# Altium PCB Top_board.PcbDoc (part 2 of 2)
Units mm, origin at the board's own origin, x right, y up, seen from the top; angles counter-clockwise.
Board outline 102 x 58.5 mm, 2 copper layers (Top Layer, Bottom Layer); 127 components, 87 nets, 328 pads, 86 vias.
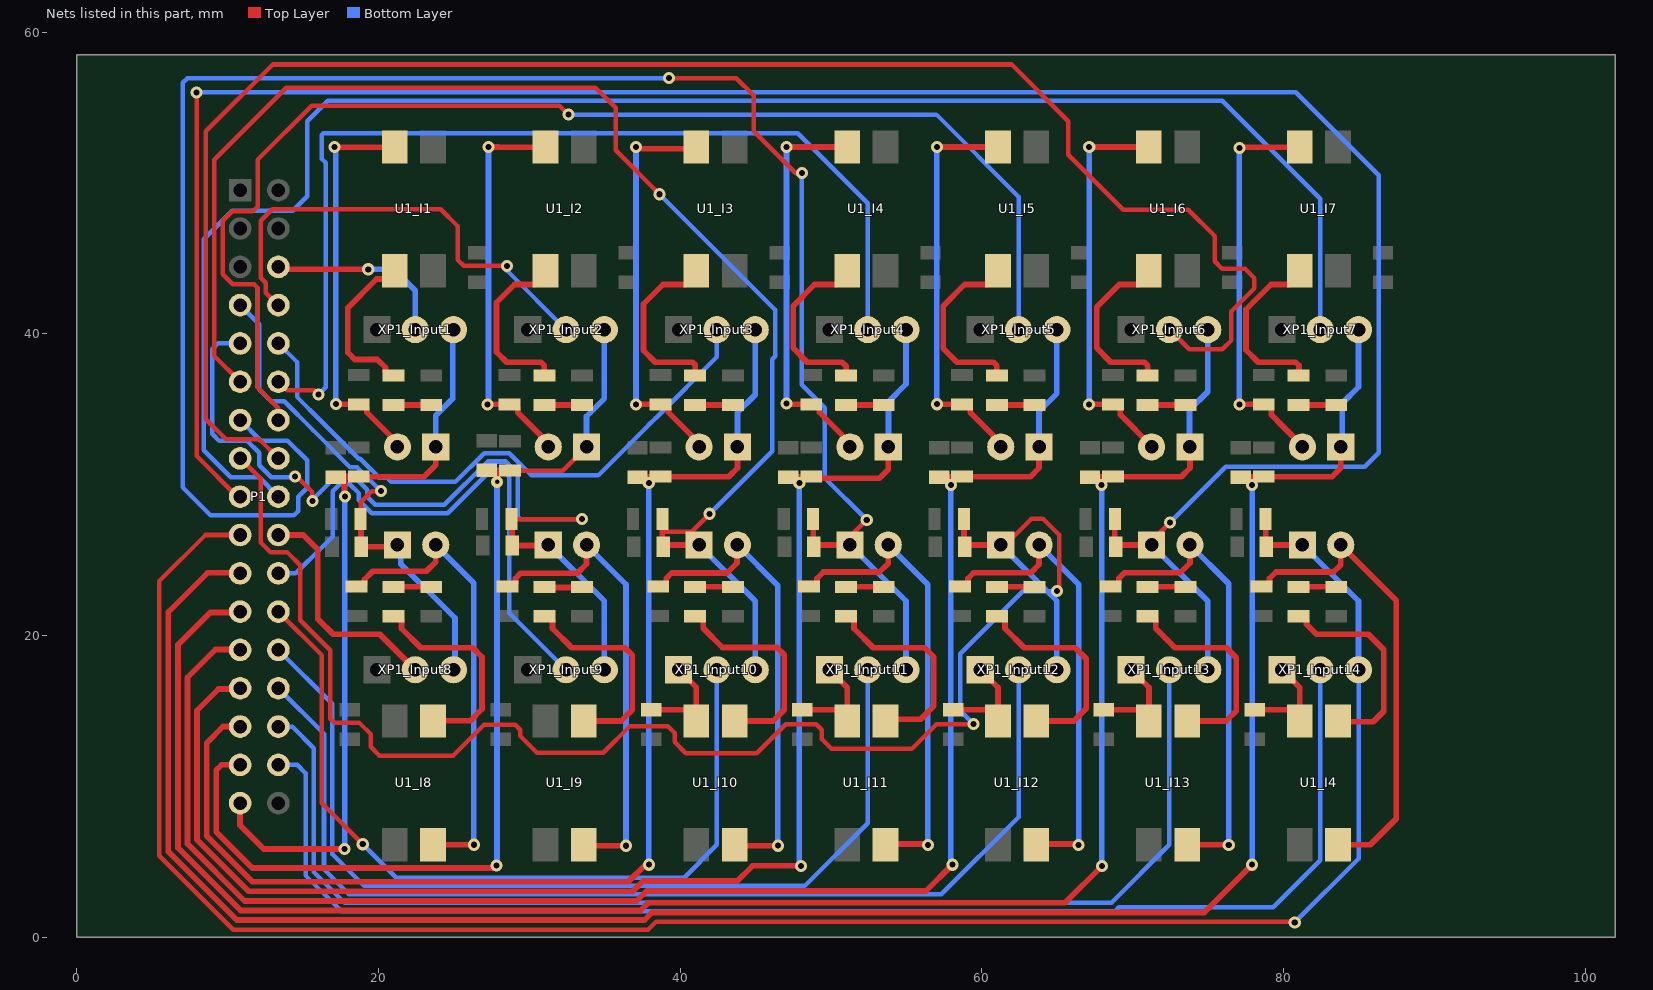
[diagram p2: the nets of this part, all layers, seen from the top]

## Via types
v1: diameter 0.8, hole 0.4, Top Layer to Bottom Layer, tented both sides, 71 vias
v2: diameter 1.27, hole 0.711, Top Layer to Bottom Layer, tented both sides, 14 vias
v3: diameter 0.8, hole 0.3, Top Layer to Bottom Layer, tented both sides, 1 vias

## Nets (pads, with @x,y where several pads share a name; then routed paths per layer and width w, separated by ;. In a path a pad name is that pad's centre, name@x,y a point inside that pad or via, vN(x,y) a via of type N, cw(c..) or ccw(c..) an arc to the next point about the centre after c; other vN are vias at no path point) (continued)
NetC1_Input10_2: C1_Input10.2 U1_I10.2 XP1_Input10.1 | length 7.1
  Top Layer w0.381: C1_Input10.2@38.1,15.08 40.42,15.08 U1_I10.2@41.08,14.42 ; XP1_Input10.1@39.9,17.725 41.08,16.545 U1_I10.2@41.08,14.42 ; U1_I10.2@41.08,14.332 U1_I10.2@41.08,14.42
NetC1_Input11_2: C1_Input11.2 U1_I11.2 XP1_Input11.1 | length 7.1
  Top Layer w0.381: C1_Input11.2@48.1,15.075 50.421,15.075 U1_I11.2@51.08,14.416 ; XP1_Input11.1@49.9,17.725 51.08,16.545 U1_I11.2@51.08,14.416 ; U1_I11.2@51.08,14.327 U1_I11.2@51.08,14.416
NetC1_Input12_2: C1_Input12.2 U1_I12.2 XP1_Input12.1 | length 7.1
  Top Layer w0.381: C1_Input12.2@58.1,15.075 60.421,15.075 U1_I12.2@61.08,14.416 ; XP1_Input12.1@59.9,17.725 61.08,16.545 U1_I12.2@61.08,14.416 ; U1_I12.2@61.08,14.327 U1_I12.2@61.08,14.416
NetC1_Input13_2: C1_Input13.2 U1_I13.2 XP1_Input13.1 | length 7.1
  Top Layer w0.381: C1_Input13.2@68.1,15.075 70.421,15.075 U1_I13.2@71.08,14.416 ; XP1_Input13.1@69.9,17.725 71.08,16.545 U1_I13.2@71.08,14.416 ; U1_I13.2@71.08,14.327 U1_I13.2@71.08,14.416
NetC1_Input14_2: C1_Input14.2 U1_I4.2@81.08,14.327 XP1_Input14.1 | length 16.2
  Top Layer w0.3: C1_Input14.2@78.1,15.075 79.197,15.075 80.099,15.075 ; U1_I4.2@81.08,14.327 81.08,14.416 U1_I4.2@81.08,14.757 ; U1_I4.2@81.08,14.757 80.416,14.757 U1_I4.2@81.08,14.757
  Top Layer w0.381: XP1_Input14.1@79.9,17.725 81.08,16.545 ; U1_I4.2@80.421,15.075 C1_Input14.2@78.1,15.075 U1_I4.2@80.421,15.075 ; U1_I4.2@80.421,15.075 U1_I4.2@81.08,14.416 ; U1_I4.2@80.421,15.075 U1_I4.2@81.08,14.416 ; U1_I4.2@81.08,14.416 81.08,16.545 ; U1_I4.2@81.08,14.416 81.08,16.545
NetHL1_Input1_1: HL1_Input1.1 R1_Input1.2 | length 2.5
  Top Layer w0.381: HL1_Input1.1@21,35.275 R1_Input1.2@23.5,35.275
NetHL1_Input1_2: HL1_Input1.2 U1_I1.1 | length 10.9
  Top Layer w0.381: HL1_Input1.2@21,37.225 20.675,37.225 20.465,37.435 20.465,37.76 19.925,38.3 18.425,38.3 17.975,38.75 17.975,41.727 19.882,43.633 20.538,43.633 21,44.095 U1_I1.1@21.08,44.175
NetHL1_Input2_1: HL1_Input2.1 R1_Input2.2 | length 2.5
  Top Layer w0.381: HL1_Input2.1@31,35.275 R1_Input2.2@33.5,35.275
NetHL1_Input2_2: HL1_Input2.2 U1_I2.1 | length 11.8
  Top Layer w0.381: HL1_Input2.2@31,37.225 31,37.9 30.78,38.12 30.366,38.12 28.506,38.12 27.825,38.8 27.825,42.075 29.016,43.265 30.421,43.265 31,43.845 31,44.095 U1_I2.1@31.08,44.175
NetHL1_Input3_1: HL1_Input3.1 R1_Input3.2 | length 2.5
  Top Layer w0.381: HL1_Input3.1@41,35.275 R1_Input3.2@43.5,35.275
NetHL1_Input3_2: HL1_Input3.2 U1_I3.1 | length 12
  Top Layer w0.381: HL1_Input3.2@41,37.225 HL1_Input3.2@41.15,37.375 ; 41,37.65 41,37.95 40.831,38.12 39.609,38.12 38.355,38.12 37.575,38.9 37.575,41.975 38.866,43.265 40.42,43.265 41,43.845 41,44.095 U1_I3.1@41.08,44.175
NetHL1_Input4_1: HL1_Input4.1 R1_Input4.2 | length 2.5
  Top Layer w0.381: HL1_Input4.1@51,35.275 R1_Input4.2@53.5,35.275
NetHL1_Input4_2: HL1_Input4.2 U1_I4.1@51.08,44.175 | length 13.7
  Top Layer w0.381: U1_I4.1@51.08,44.175 51,44.095 51,43.845 50.421,43.265 48.916,43.265 47.5,41.85 47.5,39.05 48.43,38.12 49.609,38.12 50.735,38.12 51.012,37.842 HL1_Input4.2@51.012,37.563 ; HL1_Input4.2@50.675,37.225 HL1_Input4.2@51.012,37.563 ; HL1_Input4.2@50.675,37.225 HL1_Input4.2@51.012,37.563 ; HL1_Input4.2@50.675,37.225 HL1_Input4.2@51,37.225 ; HL1_Input4.2@51,37.225 50.791,37.435 HL1_Input4.2@51,37.225
NetHL1_Input5_1: HL1_Input5.1 R1_Input5.2 | length 2.5
  Top Layer w0.381: HL1_Input5.1@61,35.275 R1_Input5.2@63.5,35.275
NetHL1_Input5_2: HL1_Input5.2 U1_I5.1 | length 12.6
  Top Layer w0.381: HL1_Input5.2@60.79,37.435 HL1_Input5.2@61,37.225 61,37.897 60.777,38.12 59.61,38.12 59.609,38.12 58.355,38.12 57.45,39.025 57.45,41.85 58.866,43.265 60.421,43.265 61,43.845 61,44.095 U1_I5.1@61.08,44.175
NetHL1_Input6_1: HL1_Input6.1 R1_Input6.2 | length 2.5
  Top Layer w0.381: HL1_Input6.1@71,35.275 R1_Input6.2@73.5,35.275
NetHL1_Input6_2: HL1_Input6.2 U1_I6.1 | length 12.1
  Top Layer w0.381: HL1_Input6.2@70.791,37.435 HL1_Input6.2@71,37.225 71,37.896 70.777,38.12 69.609,38.12 68.556,38.12 67.625,39.05 67.625,41.775 69.116,43.265 70.421,43.265 71,43.845 71,44.095 U1_I6.1@71.08,44.175
NetHL1_Input7_1: HL1_Input7.1 R1_Input7.2 | length 2.5
  Top Layer w0.381: HL1_Input7.1@81,35.275 R1_Input7.2@83.5,35.275
NetHL1_Input7_2: HL1_Input7.2 U1_I7.1 | length 12.5
  Top Layer w0.381: HL1_Input7.2@80.79,37.435 HL1_Input7.2@81,37.225 81.025,37.25 81.025,37.896 80.802,38.12 79.609,38.12 78.331,38.12 77.525,38.925 77.525,41.62 79.171,43.265 80.421,43.265 81.08,43.925 U1_I7.1@81.08,44.175 U1_I7.1@81,44.095
NetHL1_Input8_1: HL1_Input8.1 R1_Input8.2 | length 2.5
  Top Layer w0.381: HL1_Input8.1@21,23.225 R1_Input8.2@23.5,23.225
NetHL1_Input8_2: HL1_Input8.2 U1_I8.1 | length 14.4
  Top Layer w0.381: HL1_Input8.2@21,21.275 21.325,21.275 21.534,21.065 21.534,20.467 22.812,19.19 26.25,19.19 26.875,18.565 26.875,15.125 26.097,14.347 23.6,14.347 U1_I8.1@23.62,14.327
NetHL1_Input9_1: HL1_Input9.1 R1_Input9.2 | length 5
  Top Layer w0.381: HL1_Input9.1@31,23.225 HL1_Input9.1@31,23.175 ; R1_Input9.2@33.5,23.225 R1_Input9.2@33.45,23.175 ; HL1_Input9.1@31,23.175 R1_Input9.2@33.45,23.175 ; HL1_Input9.1@31,23.175 R1_Input9.2@33.45,23.175
NetHL1_Input9_2: HL1_Input9.2 U1_I9.1 | length 14.4
  Top Layer w0.381: HL1_Input9.2@31,21.275 31.325,21.275 31.535,21.065 31.535,20.467 32.812,19.19 36.335,19.19 36.825,18.7 36.825,15.075 36.077,14.327 U1_I9.1@33.62,14.327
NetHL1_Input10_1: HL1_Input10.1 R1_Input10.2 | length 5
  Top Layer w0.381: HL1_Input10.1@41,23.23 43.5,23.23 HL1_Input10.1@41,23.23
NetHL1_Input10_2: HL1_Input10.2 U1_I10.1 | length 14.5
  Top Layer w0.381: HL1_Input10.2@41,21.275 41.325,21.275 41.534,21.065 41.534,20.842 41.534,20.472 42.812,19.195 46.43,19.195 46.9,18.725 46.9,15.075 46.152,14.327 U1_I10.1@43.62,14.327
NetHL1_Input11_1: HL1_Input11.1 R1_Input11.2 | length 2.5
  Top Layer w0.381: HL1_Input11.1@51,23.225 R1_Input11.2@53.5,23.225
NetHL1_Input11_2: HL1_Input11.2 U1_I11.1 | length 14.2
  Top Layer w0.381: HL1_Input11.2@51,21.275 51.325,21.275 51.535,21.065 51.535,20.842 51.535,20.467 52.812,19.19 56.21,19.19 56.825,18.575 56.825,15.325 55.95,14.45 53.743,14.45 U1_I11.1@53.62,14.327
NetHL1_Input12_1: HL1_Input12.1 R1_Input12.2 | length 2.5
  Top Layer w0.381: HL1_Input12.1@61,23.225 R1_Input12.2@63.5,23.225
NetHL1_Input12_2: HL1_Input12.2 U1_I12.1 | length 14.4
  Top Layer w0.381: HL1_Input12.2@61,21.275 61.325,21.275 61.534,21.065 61.534,20.842 61.534,20.467 62.812,19.19 66.185,19.19 66.925,18.45 66.925,15.15 66.102,14.327 U1_I12.1@63.62,14.327
NetHL1_Input13_1: HL1_Input13.1 R1_Input13.2 | length 2.5
  Top Layer w0.381: HL1_Input13.1@71,23.225 R1_Input13.2@73.5,23.225
NetHL1_Input13_2: HL1_Input13.2 U1_I13.1 | length 14.4
  Top Layer w0.381: HL1_Input13.2@71,21.275 71.325,21.275 71.534,21.065 71.534,20.467 72.812,19.19 76.21,19.19 76.875,18.525 76.875,15 76.202,14.327 U1_I13.1@73.62,14.327
NetHL1_Input14_1: HL1_Input14.1 R1_Input14.2 | length 2.5
  Top Layer w0.381: HL1_Input14.1@81,23.225 R1_Input14.2@83.5,23.225
NetHL1_Input14_2: HL1_Input14.2 U1_I4.1@83.62,14.327 | length 14.2
  Top Layer w0.381: HL1_Input14.2@81,21.275 81.325,21.275 81.535,21.065 81.535,20.74 82.2,20.075 85.625,20.075 86.65,19.05 86.65,14.975 85.95,14.275 83.672,14.275 U1_I4.1@83.62,14.327
NetR2_Input1_2: P0.2 R2_Input1.2 U1_I1.4 | length 26.8
  Top Layer w0.381: v1@17.105,52.355 v1@17.125,52.375 ; v1(17.175,35.35) 17.2,35.325 R2_Input1.2@18.7,35.325 19.025,35.325 19.235,35.115 19.235,34.79 21.26,32.765 P0.2@21.26,32.5 ; U1_I1.4@21.08,52.375 v1@17.125,52.375 ; v1@17.125,52.375 17.075,52.325 v1@17.125,52.375
  Bottom Layer w0.381: v1(17.075,52.385) 17.075,52.272 17.175,52.172 v1(17.175,35.35)
NetR2_Input2_2: P1.2@31.26,32.5 R2_Input2.2 U1_I2.4 | length 27.1
  Top Layer w0.3: v1@27.405,52.28 27.53,52.28 v1@27.53,52.38
  Top Layer w0.381: v1(27.225,35.325) R2_Input2.2@28.7,35.325 29.025,35.325 29.234,35.115 29.234,34.79 31.26,32.765 P1.2@31.26,32.5 ; v1@27.53,52.38 27.938,52.38 27.968,52.375 U1_I2.4@31.08,52.375 ; v1@27.405,52.28 27.3,52.175 v1@27.405,52.28 ; v1@27.405,52.28 27.53,52.405 v1@27.405,52.28
  Bottom Layer w0.381: v1(27.225,35.325) 27.3,35.4 v1(27.3,52.385)
NetR2_Input3_2: P2.2 R2_Input3.2 U1_I3.4 | length 30.7
  Top Layer w0.381: v1(37.075,35.325) R2_Input3.2@38.7,35.325 39.025,35.325 39.235,35.115 39.235,34.79 41.26,32.765 P2.2@41.26,32.5 ; U1_I3.4@41.08,52.375 U1_I3.4@40.975,52.27 ; U1_I3.4@40.975,52.27 37.075,52.27 U1_I3.4@40.975,52.27
  Bottom Layer w0.381: v1(37.075,35.325) v1(37.075,52.385)
NetR2_Input4_2: P3.2 R2_Input4.2 U1_I4.4@51.08,52.375 | length 26.8
  Top Layer w0.381: v1(47.06,35.365) 47.1,35.325 R2_Input4.2@48.7,35.325 49.025,35.325 49.234,35.115 49.234,34.79 51.26,32.765 P3.2@51.26,32.5 ; v1(47.06,52.385) 51.07,52.385 U1_I4.4@51.08,52.375
  Bottom Layer w0.381: v1(47.06,35.365) v1(47.06,52.385)
NetR2_Input5_2: P4.2 R2_Input5.2 U1_I5.4 | length 26.9
  Top Layer w0.381: v1(57.02,52.385) 61.07,52.385 U1_I5.4@61.08,52.375 ; v1(57.045,35.33) 57.05,35.325 R2_Input5.2@58.7,35.325 59.025,35.325 59.234,35.115 59.234,34.79 61.26,32.765 P4.2@61.26,32.5
  Bottom Layer w0.381: v1(57.02,52.385) 57.02,35.355 v1(57.045,35.33)
NetR2_Input6_2: P5.2 R2_Input6.2 U1_I6.4 | length 26.7
  Top Layer w0.381: v1(67.115,35.315) 67.125,35.325 R2_Input6.2@68.7,35.325 68.977,35.325 69.186,35.115 69.186,34.64 71.26,32.567 P5.2@71.26,32.5 ; v1(67.125,52.385) 71.07,52.385 U1_I6.4@71.08,52.375
  Bottom Layer w0.381: v1(67.115,35.315) 67.125,35.325 v1(67.125,52.385)
NetR2_Input7_2: P6.2 R2_Input7.2 U1_I7.4 | length 26.7
  Top Layer w0.381: v1(77.075,35.325) R2_Input7.2@78.7,35.325 78.977,35.325 79.186,35.115 79.186,34.64 79.991,33.835 79.991,33.834 81.26,32.565 P6.2@81.26,32.5 ; v1(77.075,52.325) 77.125,52.375 77.525,52.375 U1_I7.4@81.08,52.375
  Bottom Layer w0.381: v1(77.075,35.325) v1(77.075,52.325)
NetR2_Input8_2: P7.2 R2_Input8.2 U1_I8.4 | length 31.4
  Top Layer w0.381: R2_Input8.2@18.55,23.25 R2_Input8.2@18.55,23.175 ; U1_I8.4@23.62,6.127 U1_I8.4@23.647,6.1 ; P7.2@23.8,26 23.8,24.875 23.175,24.25 19.625,24.25 19.084,23.71 19.084,23.385 R2_Input8.2@18.875,23.175 ; v1(26.325,6.125) U1_I8.4@23.672,6.125 ; R2_Input8.2@18.55,23.175 R2_Input8.2@18.875,23.175 ; R2_Input8.2@18.55,23.175 R2_Input8.2@18.875,23.175 ; U1_I8.4@23.647,6.1 U1_I8.4@23.672,6.125 ; U1_I8.4@23.647,6.1 U1_I8.4@23.672,6.125
  Bottom Layer w0.381: P7.2@23.8,26 26.325,23.475 v1(26.325,6.125)
NetR2_Input9_2: P8.2 R2_Input9.2 U1_I9.4 | length 31.2
  Top Layer w0.381: R2_Input9.2@28.55,23.25 28.875,23.25 29.084,23.459 29.084,23.785 29.42,24.12 33.18,24.12 33.8,24.74 P8.2@33.8,26 ; U1_I9.4@33.62,6.125 33.687,6.058 v1(36.42,6.058)
  Bottom Layer w0.381: P8.2@33.8,26 36.42,23.38 v1@36.42,6.06
NetR2_Input10_2: P9.2 R2_Input10.2 U1_I10.4 | length 31.3
  Top Layer w0.381: R2_Input10.2@38.55,23.25 38.875,23.25 39.085,23.459 39.085,23.785 39.44,24.14 43.112,24.14 43.772,24.8 43.772,25.972 P9.2@43.8,26 ; v1(46.48,6.06) U1_I10.4@43.692,6.06 ; U1_I10.4@43.692,6.06 43.62,6.132 U1_I10.4@43.692,6.06
  Bottom Layer w0.381: P9.2@43.8,26 46.48,23.32 v1(46.48,6.06)
NetR2_Input11_2: 10.2 R2_Input11.2 U1_I11.4 | length 33.9
  Top Layer w0.381: R2_Input11.2@48.55,23.25 48.875,23.25 49.084,23.459 49.084,23.785 49.5,24.2 53.225,24.2 53.8,24.775 10.2@53.8,26 ; U1_I11.4@53.62,6.127 U1_I11.4@53.668,6.175 ; U1_I11.4@53.668,6.175 56.425,6.175 U1_I11.4@53.668,6.175
  Bottom Layer w0.381: 10.2@53.8,26 56.425,23.375 v1(56.425,6.1)
NetR2_Input12_2: 11.2 R2_Input12.2 U1_I12.4 | length 33.9
  Top Layer w0.381: R2_Input12.2@58.55,23.25 58.875,23.25 59.085,23.459 59.085,23.785 59.45,24.15 63.25,24.15 63.8,24.7 11.2@63.8,26 ; U1_I12.4@63.62,6.127 U1_I12.4@63.668,6.175 ; U1_I12.4@63.668,6.175 66.425,6.175 U1_I12.4@63.668,6.175
  Bottom Layer w0.381: 11.2@63.8,26 66.425,23.375 v1(66.425,6.1)
NetR2_Input13_2: P12.2 R2_Input13.2 U1_I13.4 | length 33.8
  Top Layer w0.381: R2_Input13.2@68.55,23.25 68.875,23.25 69.084,23.459 69.084,23.785 69.45,24.15 73.15,24.15 73.8,24.8 P12.2@73.8,26 ; U1_I13.4@73.62,6.127 U1_I13.4@73.622,6.125 ; U1_I13.4@73.622,6.125 76.375,6.125 U1_I13.4@73.622,6.125
  Bottom Layer w0.381: P12.2@73.8,26 76.375,23.425 v1(76.375,6.1)
NetR2_Input14_2: P13.2 R2_Input14.2 U1_I4.4@83.62,6.127 | length 31.6
  Top Layer w0.381: R2_Input14.2@78.55,23.25 78.875,23.25 79.085,23.459 79.085,23.785 79.5,24.2 83.325,24.2 83.8,24.675 P13.2@83.8,26 87.475,22.325 87.475,7.85 85.752,6.127 U1_I4.4@83.62,6.127
P1: C2_Input1.2 P0.1 P1.33 R3_Input1.2 XP1_Input1.3 | length 51.9
  Top Layer w0.3: R3_Input1.2@18.7,30.525 R3_Input1.2@19,30.525
  Top Layer w0.381: P1.33@10.83,8.88 10.83,7.42 12.4,5.85 v1(17.75,5.85) ; v1(17.776,29.226) 17.776,29.34 v1@17.75,29.366 ; R3_Input1.2@18.7,30.525 18.687,30.513 17.188,30.513 C2_Input1.2@17.175,30.5 C2_Input1.2@17.75,30.5 ; R3_Input1.2@19,30.525 23.025,30.525 23.8,31.3 23.8,32.45 23.775,32.475 P0.1@23.8,32.5 ; v1@17.75,29.366 C2_Input1.2@17.75,30.5 ; v1@17.75,29.366 C2_Input1.2@17.75,30.5
  Bottom Layer w0.381: v1(17.75,5.85) 17.776,5.876 v1(17.776,29.226) ; P0.1@23.8,32.5 23.8,34.575 24.92,35.695 24.92,40.215 XP1_Input1.3@24.98,40.275
P2: C2_Input2.2 P1.1@33.8,32.5 P1.31 R3_Input2.2 XP1_Input2.3 | length 67.2
  Top Layer w0.3: C2_Input2.2@27.175,30.95 27.915,30.95 ; v3(27.867,30.175) 27.915,30.223 27.915,30.95 ; P1.1@33.8,32.5 32.225,30.925 R3_Input2.2@28.725,30.925 27.94,30.925 27.915,30.95
  Top Layer w0.381: P1.31@10.83,11.42 9.595,11.42 9.25,11.075 9.25,6.975 11.642,4.582 24.654,4.582 27.657,4.582 v1(27.825,4.75)
  Bottom Layer w0.381: v1(27.825,4.75) 27.867,4.792 27.867,26.336 27.867,26.403 v3(27.867,30.175) ; P1.1@33.8,32.5 33.8,34.525 34.98,35.705 XP1_Input2.3@34.98,40.275
P3: C2_Input3.2 P1.29 P2.1 R3_Input3.2 XP1_Input3.3 | length 82.9
  Top Layer w0.3: C2_Input3.2@37.175,30.5 37.603,30.5 38.055,30.048 R3_Input3.2@38.055,30.525 ; 37.937,30.513 37.937,30.525 R3_Input3.2@38.055,30.525 ; R3_Input3.2@38.7,30.525 R3_Input3.2@38.055,30.525
  Top Layer w0.381: P1.29@10.83,13.96 9.7,13.96 8.615,12.875 8.615,6.712 11.656,3.671 36.571,3.671 37.7,4.8 v1(37.95,4.8) ; v1(37.925,30.1) 37.937,30.113 37.937,30.513 ; R3_Input3.2@38.7,30.525 43.225,30.525 43.8,31.1 P2.1@43.8,32.5
  Bottom Layer w0.381: v1(37.925,30.1) 37.925,4.825 v1(37.95,4.8) ; P2.1@43.8,32.5 43.8,34.784 44.98,35.964 XP1_Input3.3@44.98,40.275
P4: C2_Input4.2 P1.27 P3.1 R3_Input4.2 XP1_Input4.3 | length 97.1
  Top Layer w0.3: C2_Input4.2@47.175,30.5 47.9,30.5 47.9,30.513 ; v1(47.902,30.1) 47.902,30.525 R3_Input4.2@48.7,30.525
  Top Layer w0.381: P1.27@10.83,16.5 10.747,16.5 10.697,16.45 9.4,16.45 7.98,15.03 7.98,6.449 11.393,3.036 36.855,3.036 37.54,3.72 43.792,3.72 44.797,4.725 v1(48.025,4.725) ; 47.9,30.513 47.9,30.1 47.9,29.979 v1@47.902,29.976 ; R3_Input4.2@48.7,30.525 48.7,30.425 53.225,30.425 53.8,31 P3.1@53.8,32.4
  Bottom Layer w0.381: v1@47.902,29.976 47.902,4.848 v1(48.025,4.725) ; P3.1@53.8,32.5 53.816,32.516 53.816,35.5 54.98,36.664 XP1_Input4.3@54.98,40.275
P5: C2_Input5.2 P1.25 P4.1 R3_Input5.2 XP1_Input5.3 | length 110.9
  Top Layer w0.381: P1.25@10.83,19.04 10.795,19.075 9.2,19.075 7.345,17.22 7.345,6.186 11.13,2.401 37.118,2.401 37.768,3.05 56.3,3.05 v1(58.05,4.8) ; C2_Input5.2@57.175,30.5 57.187,30.513 58.688,30.513 R3_Input5.2@58.7,30.525 ; 57.938,30.513 57.938,29.992 v1(57.953,29.976) ; R3_Input5.2@58.7,30.525 63.225,30.525 63.8,31.1 P4.1@63.8,32.5
  Bottom Layer w0.381: v1(57.953,29.976) 57.953,4.897 v1(58.05,4.8) ; P4.1@63.8,32.5 63.8,34.868 64.98,36.048 XP1_Input5.3@64.98,40.275
P6: C2_Input6.2 P1.23 P5.1 R3_Input6.2 XP1_Input6.3 | length 125.1
  Top Layer w0.381: P1.23@10.83,21.58 10.775,21.525 8.85,21.525 6.71,19.385 6.71,5.923 10.867,1.766 37.381,1.766 37.891,2.275 65.525,2.275 v1(67.975,4.725) ; C2_Input6.2@67.175,30.5 67.188,30.513 68.687,30.513 R3_Input6.2@68.7,30.525 73.225,30.525 73.8,31.1 P5.1@73.8,32.5 ; 67.95,30.513 67.95,29.98 v1(67.953,29.976)
  Bottom Layer w0.381: v1(67.953,29.976) 67.953,4.747 v1(67.975,4.725) ; P5.1@73.8,32.5 73.775,32.525 73.775,34.95 74.98,36.155 XP1_Input6.3@74.98,40.275
P7: C2_Input7.2 P1.21 P6.1 R3_Input7.2 XP1_Input7.3 | length 139.3
  Top Layer w0.381: P1.21@10.83,24.12 10.75,24.2 10.7,24.15 8.675,24.15 6.075,21.55 6.075,5.66 10.604,1.131 37.644,1.131 38.139,1.625 74.75,1.625 v1(77.925,4.8) ; C2_Input7.2@77.175,30.5 77.188,30.513 78.688,30.513 R3_Input7.2@78.7,30.525 83.225,30.525 83.8,31.1 P6.1@83.8,32.5 ; v1(77.929,29.976) 77.95,29.998 77.95,30.513
  Bottom Layer w0.381: v1(77.925,4.8) 77.929,4.804 v1(77.929,29.976) ; P6.1@83.8,32.5 83.9,32.6 83.9,35.4 84.98,36.48 XP1_Input7.3@84.98,40.275
P8: C2_Input8.2 P1.7 P7.1 R3_Input8.2 XP1_Input8.3 | length 36.1
  Top Layer w0.3: R3_Input8.2@18.825,27.725 18.825,28.833 19.558,29.566 v1(20.168,29.566)
  Top Layer w0.381: R3_Input8.2@18.825,27.725 R3_Input8.2@18.85,27.7 ; P7.1@21.26,26 P7.1@21.185,26.075 ; C2_Input8.2@18.85,25.875 R3_Input8.2@18.85,27.7 ; C2_Input8.2@18.85,25.875 R3_Input8.2@18.85,27.7 ; C2_Input8.2@18.85,25.875 C2_Input8.2@18.875,25.875 P7.1@20.985,25.875 ; P7.1@20.985,25.875 P7.1@21.185,26.075 ; P7.1@20.985,25.875 P7.1@21.185,26.075
  Bottom Layer w0.3: P1.7@10.83,41.9 12.09,40.64 12.09,36.322 12.878,35.535 13.747,35.535 15.662,33.621 18.144,31.138 18.595,31.138 v1(20.168,29.566)
  Bottom Layer w0.381: P7.1@21.26,26 21.473,25.786 21.473,24.752 25.075,21.15 25.075,17.82 XP1_Input8.3@24.98,17.725
P9: C2_Input9.2 P1.9 P8.1 R3_Input9.2 XP1_Input9.3 | length 67.1
  Top Layer w0.3: v1(14.475,30.525) 14.6,30.525 15.626,29.499 v1(15.626,28.901) ; R3_Input9.2@28.825,27.725 R3_Input9.2@28.825,27.711 ; R3_Input9.2@28.825,27.711 v1(33.503,27.711) R3_Input9.2@28.825,27.711
  Top Layer w0.381: P8.1@31.26,26 31.22,25.96 C2_Input9.2@28.875,25.96 28.85,25.985 R3_Input9.2@28.85,27.7 ; R3_Input9.2@28.85,27.7 R3_Input9.2@28.825,27.725 R3_Input9.2@28.85,27.7
  Bottom Layer w0.3: P1.9@10.83,39.36 9.366,39.36 8.976,38.97 8.976,33.374 9.456,32.894 11.308,32.894 12.1,32.102 12.1,31.284 12.898,30.486 ; v1@14.691,30.586 v1@14.652,30.625 ; v1(15.626,28.901) 15.626,28.849 15.552,28.923 16.098,29.469 17.213,30.584 18.338,30.584 19.264,29.659 19.264,29.191 19.793,28.662 24.372,28.662 27.243,31.533 28.442,31.533 29.231,30.745 29.231,27.887 29.406,27.711 v1(33.503,27.711) ; 12.898,30.486 14.691,30.486 12.898,30.486 ; v1@14.652,30.625 14.475,30.625 v1@14.652,30.625
  Bottom Layer w0.381: P8.1@31.26,26 34.98,22.28 XP1_Input9.3@34.98,17.725
P10: C2_Input10.2 P1.11 P9.1 R3_Input10.2 XP1_Input10.3 | length 100
  Top Layer w0.3: P1.11@10.83,36.82 9.119,38.531 9.119,51.537 13.894,56.312 34.392,56.312 35.725,54.978 35.725,52.159 v1(38.633,49.251) ; R3_Input10.2@38.825,27.725 38.825,26.885 ; v1(41.961,28.067) P9.1@40.779,26.885 ; 38.825,26.885 P9.1@40.779,26.885 ; 38.825,26.885 P9.1@40.779,26.885
  Top Layer w0.381: P9.1@41.26,26 39,26 C2_Input10.2@38.875,25.875 C2_Input10.2@38.825,25.925 ; C2_Input10.2@38.825,25.925 R3_Input10.2@38.825,27.725 C2_Input10.2@38.825,25.925
  Bottom Layer w0.3: v1(38.633,49.251) 46.304,41.58 46.304,38.506 46.101,38.303 46.101,32.207 v1(41.961,28.067)
  Bottom Layer w0.381: P9.1@41.26,26 44.98,22.28 XP1_Input10.3@44.98,17.725
P11: 10.1 C2_Input11.2 P1.13 R3_Input11.2 XP1_Input11.3 | length 138.8
  Top Layer w0.3: v1(39.268,56.947) 43.728,56.947 44.874,55.801 44.874,53.434 47.658,50.65 v1(48.073,50.65) ; 48.825,26.588 R3_Input11.2@48.825,27.725 ; 10.1@50.597,25.883 v1(52.375,27.661) 10.1@50.597,25.883
  Top Layer w0.381: C2_Input11.2@48.825,25.925 R3_Input11.2@48.825,27.725 C2_Input11.2@48.825,25.925 ; C2_Input11.2@48.825,25.925 C2_Input11.2@48.875,25.875 C2_Input11.2@49,26 ; C2_Input11.2@49,26 10.1@51.26,26 C2_Input11.2@49,26
  Bottom Layer w0.3: P1.13@10.83,34.28 12.192,32.918 13.97,32.918 15.279,31.609 15.279,31.141 15.279,30.192 15.271,30.184 15.271,29.796 14.675,29.2 14.675,28.25 14.382,27.957 8.89,27.957 7.036,29.811 7.036,56.642 7.341,56.947 v1(39.268,56.947) ; v1(48.073,50.65) 48.073,36.627 49.604,35.096 49.604,30.431 v1(52.375,27.661)
  Bottom Layer w0.381: 10.1@51.26,26 54.98,22.28 XP1_Input11.3@54.98,17.725
P12: 11.1 C2_Input12.2 P1.15 R3_Input12.2 XP1_Input12.3 | length 107.8
  Top Layer w0.3: P1.15@10.83,31.74 12.192,30.378 12.192,26.162 12.852,25.502 13.97,25.502 14.808,24.663 14.808,21.018 16.815,19.011 16.815,14.478 17.094,14.199 18.745,14.199 19.482,13.462 19.482,12.624 20.066,12.04 24.968,12.04 27,14.072 29.078,14.072 29.4,13.75 29.4,13.335 30.518,12.217 34.9,12.217 36.678,13.995 39.192,13.995 39.631,13.556 39.631,12.947 40.386,12.192 45.085,12.192 47.015,14.122 49.022,14.122 49.403,13.741 49.403,13.132 50.038,12.497 55.372,12.497 56.998,14.122 v1(59.461,14.122) ; 58.825,26.67 R3_Input12.2@58.825,27.725 ; 11.1@61.443,25.883 63.297,27.737 64.059,27.737 65.126,26.67 65.126,23.063 v1(64.999,22.936)
  Top Layer w0.381: R3_Input12.2@58.825,27.725 58.825,25.925 C2_Input12.2@58.875,25.875 59,26 11.1@61.26,26
  Bottom Layer w0.3: v1(59.461,14.122) 58.572,15.011 58.572,18.796 62.713,22.936 v1(64.999,22.936)
  Bottom Layer w0.381: 11.1@61.26,26 64.98,22.28 XP1_Input12.3@64.98,17.725
P13: C2_Input13.2 P1.17 P12.1 R3_Input13.2 XP1_Input13.3 | length 166.4
  Top Layer w0.3: v1(7.95,56.007) 7.95,31.897 P1.17@10.647,29.2 ; 68.825,26.908 R3_Input13.2@68.825,27.725 ; P12.1@70.866,25.883 v1(72.466,27.483) P12.1@70.866,25.883
  Top Layer w0.381: P1.17@10.647,29.2 P1.17@10.83,29.2 ; C2_Input13.2@68.825,25.925 R3_Input13.2@68.825,27.725 C2_Input13.2@68.825,25.925 ; C2_Input13.2@68.825,25.925 C2_Input13.2@68.875,25.875 C2_Input13.2@69,26 ; C2_Input13.2@69,26 P12.1@71.26,26 C2_Input13.2@69,26
  Bottom Layer w0.3: v1(7.95,56.007) 80.816,56.007 86.309,50.514 86.309,32.106 85.395,31.191 76.175,31.191 v1(72.466,27.483)
  Bottom Layer w0.381: P12.1@71.26,26 74.98,22.28 XP1_Input13.3@74.98,17.725
P14: C2_Input14.2 P1.19 P13.1 R3_Input14.2 XP1_Input14.3 | length 135.6
  Top Layer w0.3: P1.19@10.527,26.66 8.535,26.66 5.481,23.606 5.481,5.395 10.375,0.5 37.875,0.5 38.405,1.03 80.695,1.03 v1(80.75,0.975) ; C2_Input14.2@78.875,25.875 C2_Input14.2@78.875,26.449
  Top Layer w0.381: P1.19@10.527,26.66 P1.19@10.83,26.66 ; R3_Input14.2@78.825,27.725 78.825,25.925 C2_Input14.2@78.875,25.875 79,26 P13.1@81.26,26
  Bottom Layer w0.3: v1(80.75,0.975) 84.98,5.205 XP1_Input14.3@84.98,17.725
  Bottom Layer w0.381: P13.1@81.26,26 84.98,22.28 XP1_Input14.3@84.98,17.725
T1: P1.6 XP1_Input1.2 | length 12.3
  Top Layer w0.381: P1.6@13.37,44.44 13.533,44.277 v1(19.326,44.277)
  Bottom Layer w0.381: v1(19.326,44.277) 21.026,44.277 22.44,42.863 XP1_Input1.2@22.44,40.275
T2: P1.8 XP1_Input2.2 | length 31.4
  Top Layer w0.3: P1.8@13.37,41.9 12.538,42.732 12.538,43.378 12.192,43.724 12.192,47.498 12.954,48.26 24.13,48.26 25.248,47.142 25.248,44.907 25.654,44.501 v1(28.524,44.501)
  Bottom Layer w0.3: v1(28.524,44.501) 28.524,44.191 XP1_Input2.2@32.44,40.275
T3: P1.10 XP1_Input3.2 | length 40.7
  Bottom Layer w0.3: P1.10@13.37,39.36 14.605,38.125 14.605,35.814 16.216,34.203 17.135,33.284 18.694,31.725 18.792,31.725 20.047,30.47 20.542,30.47 20.837,30.175 25.102,30.175 27.014,32.087 28.672,32.087 30.145,30.614 34.589,30.614 37.896,33.921 37.896,33.933 38.367,34.404 38.379,34.404 42.44,38.465 XP1_Input3.2@42.44,40.275
T4: P1.12 XP1_Input4.2 | length 67.1
  Top Layer w0.3: P1.12@13.37,36.82 13.944,36.246 15.748,36.246 v1(16.027,35.966)
  Bottom Layer w0.3: v1(16.027,35.966) 16.51,36.449 16.51,51.333 16.256,51.587 16.256,53.188 16.358,53.289 47.803,53.289 52.44,48.652 XP1_Input4.2@52.44,40.275
T5: P1.14 XP1_Input5.2 | length 84.6
  Top Layer w0.3: P1.14@13.37,34.28 13.37,35.068 11.984,36.454 11.984,43.053 11.755,43.282 10.336,43.282 9.676,43.942 9.676,47.498 10.312,48.134 11.684,48.134 11.989,48.439 11.989,51.537 15.57,55.118 32.004,55.118 v1(32.588,54.534)
  Bottom Layer w0.3: v1(32.588,54.534) 56.998,54.534 62.44,49.091 XP1_Input5.2@62.44,40.275
T6: P1.16 XP1_Input6.2 | length 114.1
  Top Layer w0.3: P1.16@13.37,31.74 12.115,32.995 9.906,32.995 8.56,34.341 8.56,53.416 12.997,57.853 61.994,57.853 65.746,54.102 65.746,51.867 69.378,48.235 73.685,48.235 75.438,46.482 75.438,44.806 75.946,44.298 77.47,44.298 78.072,43.696 78.072,43.007 76.556,41.491 76.556,39.573 75.946,38.964 73.751,38.964 XP1_Input6.2@72.44,40.275
T7: P1.18 XP1_Input7.2 | length 112.3
  Bottom Layer w0.3: P1.18@13.37,29.2 12.09,30.48 10.212,30.48 8.422,32.27 8.422,36.454 8.422,46.268 10.312,48.158 14.326,48.158 15.291,49.124 15.291,54.102 16.637,55.448 75.952,55.448 82.44,48.96 XP1_Input7.2@82.44,40.275
T8: P1.20 XP1_Input8.2 | length 15.5
  Top Layer w0.381: P1.20@13.37,26.66 15.015,26.66 15.975,25.7 15.975,21.1 17,20.075 20.09,20.075 XP1_Input8.2@22.44,17.725
T9: P1.22 XP1_Input9.2 | length 36.3
  Bottom Layer w0.3: P1.22@13.37,24.12 14.525,24.12 15.357,24.952 15.361,24.952 16.972,26.563 16.972,29.559 17.443,30.03 18.109,30.03 18.71,29.43 18.71,28.962 19.564,28.108 24.601,28.108 27.473,30.979 28.213,30.979 28.677,30.515 28.677,21.488 XP1_Input9.2@32.44,17.725
T10: P1.24 XP1_Input10.2 | length 54.6
  Top Layer w0.3: P1.24@13.37,21.58 16.256,18.694 16.256,8.865 v1(18.961,6.159)
  Bottom Layer w0.3: v1(18.961,6.159) 21.175,3.946 40.268,3.946 42.44,6.118 XP1_Input10.2@42.44,17.725
T11: P1.26 XP1_Input11.2 | length 63.3
  Bottom Layer w0.3: P1.26@13.37,19.04 16.946,15.464 16.946,5.508 19.062,3.392 48.274,3.392 52.44,7.558 XP1_Input11.2@52.44,17.725
T12: P1.28 XP1_Input12.2 | length 71.9
  Bottom Layer w0.3: P1.28@13.37,16.5 16.392,13.478 16.392,4.492 18.046,2.838 57.321,2.838 62.44,7.957 XP1_Input12.2@62.44,17.725
T13: P1.30 XP1_Input13.2 | length 81.9
  Bottom Layer w0.3: P1.30@13.37,13.96 14.29,13.96 15.723,12.527 15.723,4.318 17.757,2.284 68.603,2.284 72.44,6.121 XP1_Input13.2@72.44,17.725
T14: P1.32 XP1_Input14.2 | length 91.5
  Bottom Layer w0.3: P1.32@12.905,11.42 P1.32@13.37,11.42 14.61,11.42 15.169,10.861 15.169,4.089 17.527,1.73 68.833,1.73 69.078,1.975 79.318,1.975 82.44,5.097 XP1_Input14.2@82.44,17.725
pads on no net: P1.5

## Polygon pours and split planes (outlines as drawn)
GND on Bottom Layer "Bottom Layer-GND" (solid, pour order 16): 0.125,0.125 101.875,0.125 101.875,58.375 0.125,58.375
no net on Bottom Layer "Bottom Layer-No Net" (solid, pour order 2): 1.6,-4.8
GND on Top Layer " " (solid, remove dead copper, pour order 6): 0.385,58.207 0.385,0.332 101.76,0.332 101.76,58.207
no net on Top Layer "Top Layer-No Net" (solid, pour order 4): 0.325,58.2

## Keep-outs
Keep-Out Layer:
  the board outline again, w0.1

## Other copper
Top Layer:
  pour cut-out: 18.6,45.378 18.6,13.025 86.282,13.025 86.282,45.471
  pour cut-out: 60.45,13.525

## Silkscreen, mask and mechanical layers (free items; w line width, h text height)
Top Overlay:
  drawing of 199 lines, arcs and shapes, not listed
  text "MegaD-14IO v0.2 /    web.skorpio" at 84.1,53.225 h1.2
  text "Digital" at 89.1,43.335 h1
  text "Standard" at 88.4,36.105 h1
  text "No pull up" at 88.3,32.3 h1
  text "Pull up" at 89.4,24.9 h1
  text "Digital" at 89.6,20.8 h1
  text "Standard" at 88.7,13.3 h1

## Text inside footprints (layer, text, board x,y; h text height)
P1: Top Overlay "2" at 12.862,52.568 h1.27 r270; Top Overlay "1" at 10.322,52.568 h1.27 r270; Top Overlay "33" at 10.322,7.356 h1.27 r270; Top Overlay "34" at 12.862,7.356 h1.27 r270